# EAGLE board pcb (EAGLE 9.7.0)
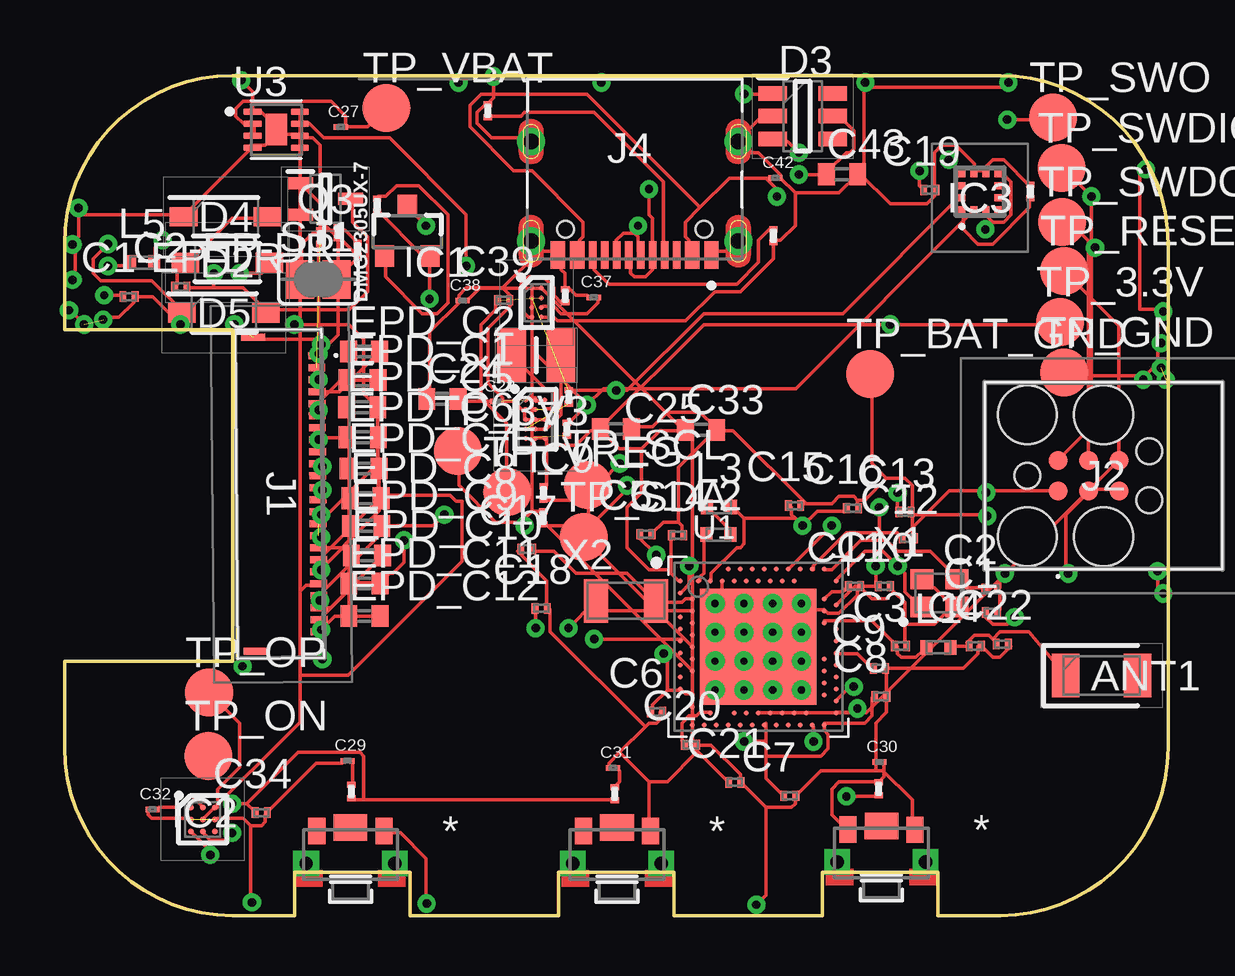
[diagram p0: board, top side]
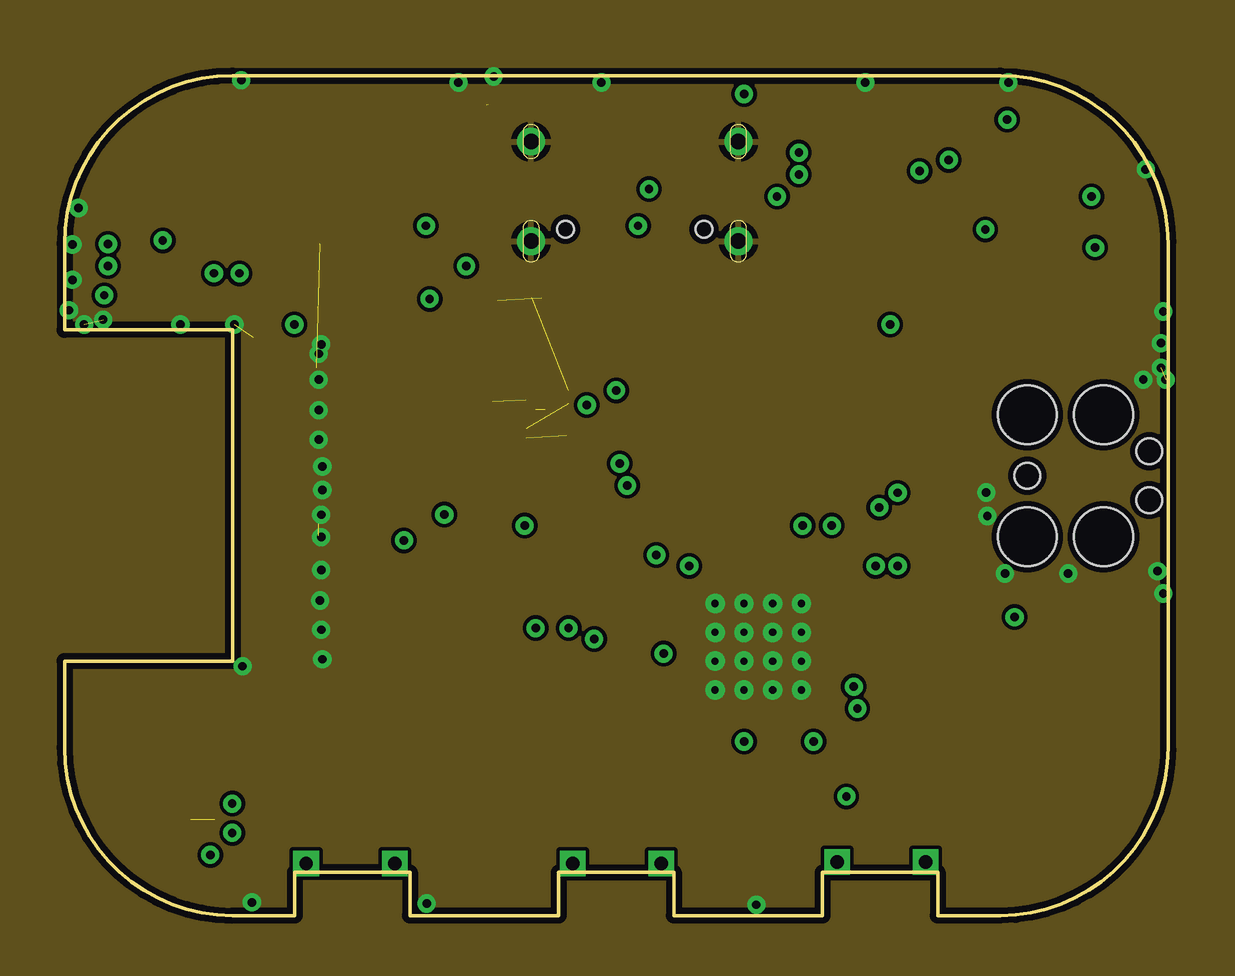
[diagram p1: board, inner layer Route2]
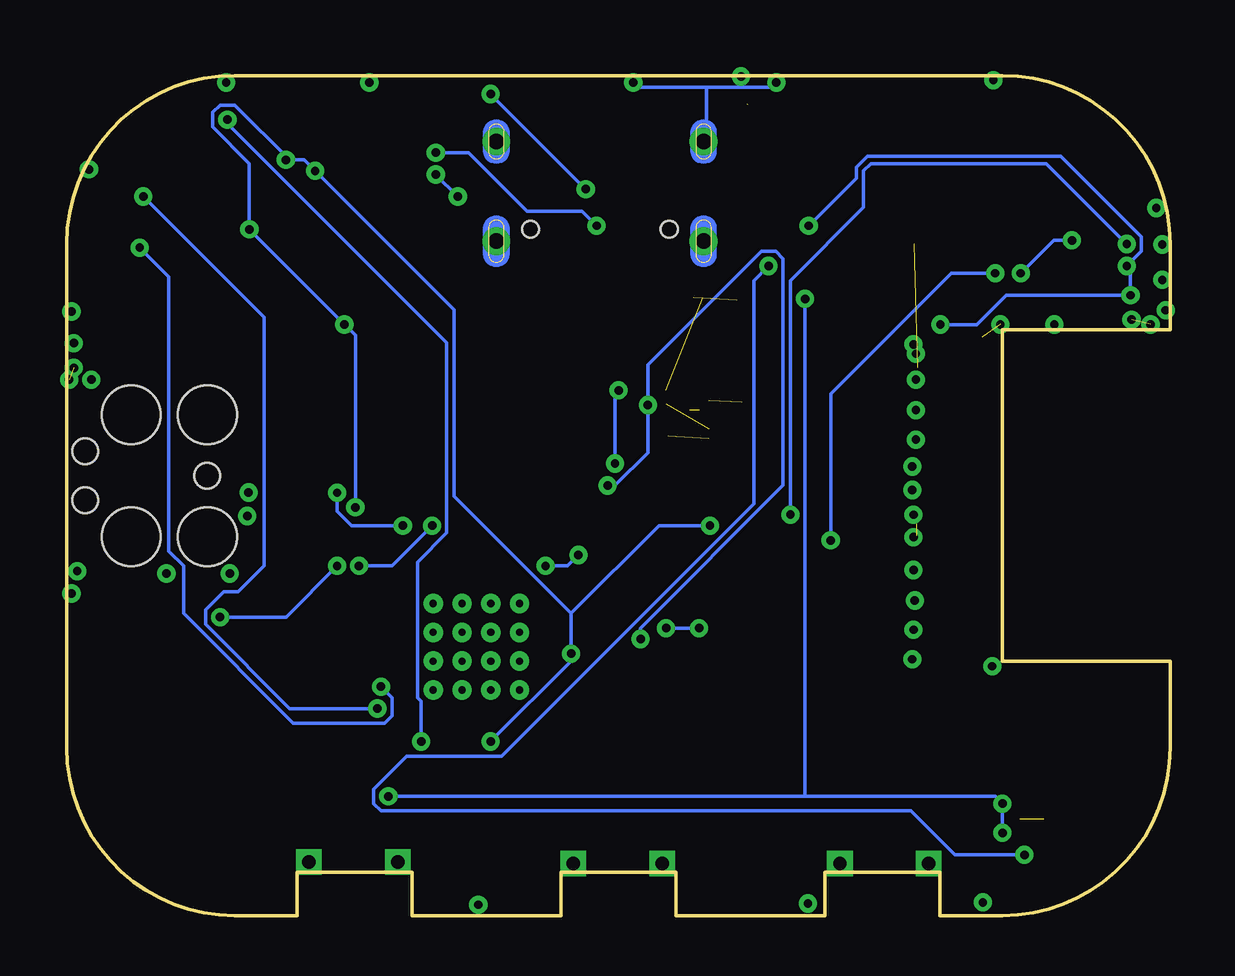
[diagram p2: board, bottom side, seen from below]

Size 46 x 35 mm. Coordinates in mm from the lower left corner, seen from the top.
Outline: 39,0 36.4,0 36.4,1.8 31.6,1.8 31.6,0 25.4,0 25.4,1.8 20.6,1.8 20.6,0 14.4,0 14.4,1.8 9.6,1.8 9.6,0 7,0 arc-90 0,7 0,10.6 7,10.6 7,24.4 0,24.4 0,28 arc-90 7,35 39,35 arc-90 46,28 46,7 arc-90 39,0
Copper layers (1+2*15+16): Top 0.035mm / dielectric 1.5mm / Route2 0.035mm / dielectric 0.15mm / Route15 0.035mm / dielectric 0.2mm / Bottom 0.035mm
Design rules "Fusion Electronics Design Rules *": minimum track width 6mil, minimum drill 0.35mm, track to track 6mil, track to pad 6mil, pad to pad 6mil, via to via 6mil, smd to smd 6mil, copper to edge 10mil, drill to drill 6mil, minimum pad ring 10mil, minimum via ring 8mil, stop-mask expansion 4mil, vias tented up to drill 9999mil, thermal gap 10mil

## Footprints (pad centres in the part's own frame; a part is rotated, then mirrored left to right if it is on the bottom)
2450AT18B100E_ANTC3216X140N = smd 1.15 x 1.8: 1 -1.5,0; 2 1.5,0
NORDIC_NRF_3_RESC0201_L = smd 0.28 x 0.43: 1 -0.255,0; 2 0.255,0
GRM011R60J152KE01L_2_CAPC0201X13N = smd 0.22 x 0.23: 1 -0.185,0; 2 0.185,0
ESP32_C6_LIBRARY_1_ESP32_WROVER_EAGLE-LTSPICE_C0402 = smd 0.7 x 0.9: 1 -0.65,0; 2 0.65,0
ESP32_C6_LIBRARY_5_SOD3716X135N = smd 1.15 x 0.8: 1 -1.75,0; 2 1.75,0
ESP32_C6_LIBRARY_3_SOT95P280X145-6N = smd 1.2 x 0.6: 1 -1.25,0.95; 2 -1.25,0; 3 -1.25,-0.95; 4 1.25,-0.95; 5 1.25,0; 6 1.25,0.95
ESP32_C6_LIBRARY_4_ESP32_C6_LIBRARY_4_ESP32_C6_LIBRARY_4_ESP32_C6_LIBRARY_4_ESP32_WROVER_SPARKFUN-DISCRETESEMI_SOT23-3 = smd 0.8 x 0.9: 1 -0.95,-1; 2 0.95,-1; 3 0,1.1
BQ25180YBGR_BGA8C40P2X4_100X155X50 = smd 0.2 x 0.2: A1 -0.2,0.6; A2 0.2,0.6; B1 -0.2,0.2; B2 0.2,0.2; C1 -0.2,-0.2; C2 0.2,-0.2; D1 -0.2,-0.6; D2 0.2,-0.6
DRV2605YZFR_BGA9C50P3X3_144X144X62 = smd 0.25 x 0.25: A1 -0.5,0.5; A2 0,0.5; A3 0.5,0.5; B1 -0.5,0; B2 0,0; B3 0.5,0; C1 -0.5,-0.5; C2 0,-0.5; C3 0.5,-0.5
BMA423_BMA423 = smd 0.3 x 0.35: 1 -0.75,-0.775; 2 -0.25,-0.775; 3 0.25,-0.775; 4 0.75,-0.775; 7 0.75,0.775; 8 0.25,0.775; 9 -0.25,0.775; 10 -0.75,0.775 | smd 0.35 x 0.3: 5 0.775,-0.25; 6 0.775,0.25; 11 -0.775,0.25; 12 -0.775,-0.25
RT6160AWSC_BGA15C40P3X5_140X230X60 = smd 0.216 x 0.216: A1 -0.4,0.8; A2 0,0.8; A3 0.4,0.8; B1 -0.4,0.4; B2 0,0.4; B3 0.4,0.4; C1 -0.4,0; C2 0,0; C3 0.4,0; D1 -0.4,-0.4; D2 0,-0.4; D3 0.4,-0.4; E1 -0.4,-0.8; E2 0,-0.8; E3 0.4,-0.8
503480-2400_5034802400 = smd 0.3 x 0.7: 1 -5.75,1.525; 2 -5.25,1.525; 3 -4.75,1.525; 4 -4.25,1.525; 5 -3.75,1.525; 6 -3.25,1.525; 7 -2.75,1.525; 8 -2.25,1.525; 9 -1.75,1.525; 10 -1.25,1.525; 11 -0.75,1.525; 12 -0.25,1.525; 13 0.25,1.525; 14 0.75,1.525; 15 1.25,1.525; 16 1.75,1.525; 17 2.25,1.525; 18 2.75,1.525; 19 3.25,1.525; 20 3.75,1.525; 21 4.25,1.525; 22 4.75,1.525; 23 5.25,1.525; 24 5.75,1.525 | smd 0.3 x 1: MP1 -6.54,-1.125; MP2 6.54,-1.125
TC2030-IDC_TC2030IDC = smd 0.783 x 0.783: 1 -0.953,-0.635; 2 -0.953,0.635; 3 0.317,-0.635; 4 0.317,0.635; 5 1.588,-0.635; 6 1.588,0.635 | hole 2.451: -2.223,-2.54; -2.223,2.54; 0.952,-2.54; 0.952,2.54 | hole 1.067: -2.223,0; 2.857,-1.016; 2.857,1.016
KH-TYPE-C-16P_KINGHELM_KH-TYPE-C-16P = smd 0.6 x 1.15: A1_B12 -3.2,4.725; A4_B9 -2.4,4.725; A9_B4 2.4,4.725; A12_B1 3.2,4.725 | smd 0.3 x 1.15: A5 -1.25,4.725; A6 -0.25,4.725; A7 0.25,4.725; A8 1.25,4.725; B5 1.75,4.725; B6 0.75,4.725; B7 -0.75,4.725; B8 -1.75,4.725 | drill 0.65 pad 1.05: SH1 -4.32,0; SH2 4.32,0; SH3 -4.32,4.15; SH4 4.32,4.15 | hole 0.7: -2.89,3.65; 2.89,3.65
NORDIC_NRF_2_RESC0402_L = smd 0.5 x 0.6: 1 -0.5,0; 2 0.5,0
MLP2016SR47MT0S1_INDC2016X100N = smd 1.2 x 2.2: 1 -1.028,0; 2 1.028,0
ESP32_C6_LIBRARY_6_SOT65P210X110-3N = smd 1.05 x 0.5: 1 -1.05,0.65; 2 -1.05,-0.65; 3 1.05,0
ERA-1AEB3401C_0201 = smd 0.35 x 0.25: 1 0,0.275; 2 0,-0.275
CPF0201D7K68C1_0201 = smd 0.35 x 0.25: 1 0,0.275; 2 0,-0.275
ESP32_C6_LIBRARY_7_JUMPER_SJ = smd 1.168 x 1.6: 1 -0.762,0; 2 0.762,0
2025-10-22_07-23-44_LIBRARY_SW_EVP-AKE31A_PAN = smd 0.711 x 1.092: 1 -1.4,-0.972; 2 1.4,-0.972 | drill 0.559 pad 0.914 square: 3 -1.848,0.381; 4 1.848,0.381 | smd 1.397 x 1.092: 5 0,-1.124
HECTOR_WATCH_1_TP20R = smd 2 x 2: TP 0,0
NORDIC_NRF_4_AQFN50P700X700X85_HS-74N = smd 4.85 x 4.85: P$74 0,0 | drill 0.3 pad 0.6: P$75 -1.8,1.8; P$76 -0.6,1.8; P$77 0.6,1.8; P$78 1.8,1.8; P$79 -1.8,0.6; P$80 -0.6,0.6; P$81 0.6,0.6; P$82 1.8,0.6; P$83 -1.8,-0.6; P$84 -0.6,-0.6; P$85 0.6,-0.6; P$86 1.8,-0.6; P$87 -1.8,-1.8; P$88 -0.6,-1.8; P$89 0.6,-1.8; P$90 1.8,-1.8 | smd 0.2 x 0.2: P$A8 -1.25,3.25; P$A10 -0.75,3.25; P$A12 -0.25,3.25; P$A14 0.25,3.25; P$A16 0.75,3.25; P$A18 1.25,3.25; P$A20 1.75,3.25; P$A22 2.25,3.25; P$A23 2.75,3.25; P$AA24 3.25,-2.25; P$AB2 -2.75,-2.5; P$AC5 -2,-2.75; P$AC9 -1,-2.75; P$AC11 -0.5,-2.75; P$AC13 0,-2.75; P$AC15 0.5,-2.75; P$AC17 1,-2.75; P$AC19 1.5,-2.75; P$AC21 2,-2.75; P$AC24 3.25,-2.75; P$AD2 -2.75,-3.25; P$AD4 -2.25,-3.25; P$AD6 -1.75,-3.25; P$AD8 -1.25,-3.25; P$AD10 -0.75,-3.25; P$AD12 -0.25,-3.25; P$AD14 0.25,-3.25; P$AD16 0.75,-3.25; P$AD18 1.25,-3.25; P$AD20 1.75,-3.25; P$AD22 2.25,-3.25; P$AD23 2.75,-3.25; P$B1 -3.25,2.75; P$B3 -2.5,2.75; P$B5 -2,2.75; P$B7 -1.5,2.75; P$B9 -1,2.75; P$B11 -0.5,2.75; P$B13 0,2.75; P$B15 0.5,2.75; P$B17 1,2.75; P$B19 1.5,2.75; P$B24 3.25,2.75; P$C1 -3.25,2.25; P$D2 -2.75,2; P$D23 2.75,2; P$E24 3.25,1.75; P$F2 -2.75,1.5; P$F23 2.75,1.5; P$G1 -3.25,1.25; P$H2 -2.75,1; P$H23 2.75,1; P$J1 -3.25,0.75; P$J24 3.25,0.75; P$K2 -2.75,0.5; P$L1 -3.25,0.25; P$L24 3.25,0.25; P$M2 -2.75,0; P$N1 -3.25,-0.25; P$N24 3.25,-0.25; P$P2 -2.75,-0.5; P$P23 2.75,-0.5; P$R1 -3.25,-0.75; P$R24 3.25,-0.75; P$T2 -2.75,-1; P$T23 2.75,-1; P$U1 -3.25,-1.25; P$U24 3.25,-1.25; P$V23 2.75,-1.5; P$W1 -3.25,-1.75; P$W24 3.25,-1.75; P$Y2 -2.75,-2; P$Y23 2.75,-2
ESP32_C6_LIBRARY_SON50P200X200X80-9N = smd 0.76 x 0.27: 1 -0.985,0.75; 2 -0.985,0.25; 3 -0.985,-0.25; 4 -0.985,-0.75; 5 0.985,-0.75; 6 0.985,-0.25; 7 0.985,0.25; 8 0.985,0.75 | smd 0.9 x 1.3: 9 0,0
NORDIC_NRF_BT-XTAL_2016_N = smd 0.95 x 0.85: 1 -0.725,-0.575; 2 0.725,-0.575; 3 0.725,0.575; 4 -0.725,0.575
NORDIC_NRF_1_XTAL_3215_N = smd 1 x 1.8: 1 -1.25,0; 2 1.25,0

## Placement (x,y rotation side)
ANT1  2450AT18B100E  [2450AT18B100E_ANTC3216X140N]  43.23,10 0 top
C1  12pF  [NORDIC_NRF_3_RESC0201_L]  38.64,12.63 0 top
C1-EP-DR  10uF  [NORDIC_NRF_3_RESC0201_L]  2.69,25.79 0 top
C2  12pF  [NORDIC_NRF_3_RESC0201_L]  38.62,13.62 0 top
C2-EP-DR  4.7uF/25V  [NORDIC_NRF_3_RESC0201_L]  4.85,26.19 0 top
C3  1pF  [NORDIC_NRF_3_RESC0201_L]  34.85,11.23 0 top
C4  1pF  [NORDIC_NRF_3_RESC0201_L]  37.96,11.23 0 top
C5  100nF  [NORDIC_NRF_3_RESC0201_L]  24.23,15.89 0 top
C6  4.7µF  [NORDIC_NRF_3_RESC0201_L]  24.68,8.48 0 top
C7  100nF  [NORDIC_NRF_3_RESC0201_L]  30.23,4.99 0 top
C8  100nF  [NORDIC_NRF_3_RESC0201_L]  34.03,9.13 0 top
C9  820pF  [NORDIC_NRF_3_RESC0201_L]  33.97,10.3 0 top
C10  N.C.  [NORDIC_NRF_3_RESC0201_L]  34.17,13.72 0 top
C11  100pF  [NORDIC_NRF_3_RESC0201_L]  32.93,13.72 0 top
C12  100nF  [NORDIC_NRF_3_RESC0201_L]  35.17,15.72 0 top
C13  N.C.  [NORDIC_NRF_3_RESC0201_L]  35.04,16.81 0 top
C14  4.7µF  [NORDIC_NRF_3_RESC0201_L]  25.56,15.85 0 top
C15  1.0µF  [NORDIC_NRF_3_RESC0201_L]  30.43,17.08 0 top
C16  47nF  [NORDIC_NRF_3_RESC0201_L]  32.85,16.97 0 top
C17  12pF  [NORDIC_NRF_3_RESC0201_L]  19.27,15.27 0 top
C18  12pF  [NORDIC_NRF_3_RESC0201_L]  19.87,12.8 0 top
C19  100nF  [NORDIC_NRF_3_RESC0201_L]  36.07,30.23 0 top
C20  4.7µF  [NORDIC_NRF_3_RESC0201_L]  26.1,7.12 0 top
C21  4.7µF  [NORDIC_NRF_3_RESC0201_L]  27.94,5.55 0 top
C22  N.C.  [NORDIC_NRF_3_RESC0201_L]  39.09,11.31 0 top
C23  0.1uF  [GRM011R60J152KE01L_2_CAPC0201X13N]  18.03,21.41 0 top
C24  10uF  [ESP32_C6_LIBRARY_1_ESP32_WROVER_EAGLE-LTSPICE_C0402]  15.75,21.53 0 top
C25  22uF  [ESP32_C6_LIBRARY_1_ESP32_WROVER_EAGLE-LTSPICE_C0402]  22.99,20.27 0 top
C27  0.1uF  [GRM011R60J152KE01L_2_CAPC0201X13N]  11.52,32.85 0 top
C29  1uF  [GRM011R60J152KE01L_2_CAPC0201X13N]  11.8,6.45 0 top
C30  1uF  [GRM011R60J152KE01L_2_CAPC0201X13N]  33.97,6.39 0 top
C31  1uF  [GRM011R60J152KE01L_2_CAPC0201X13N]  22.87,6.15 0 top
C32  1uF  [GRM011R60J152KE01L_2_CAPC0201X13N]  3.67,4.42 0 top
C33  22uF  [ESP32_C6_LIBRARY_1_ESP32_WROVER_EAGLE-LTSPICE_C0402]  26.54,20.24 0 top
C34  0.1uF  [NORDIC_NRF_3_RESC0201_L]  8.2,4.29 0 top
C37  1uF  [GRM011R60J152KE01L_2_CAPC0201X13N]  22.06,25.76 0 top
C38  1uF  [GRM011R60J152KE01L_2_CAPC0201X13N]  16.6,25.62 0 top
C39  10uF  [NORDIC_NRF_3_RESC0201_L]  18.31,25.64 0 top
C42  0.1uF  [GRM011R60J152KE01L_2_CAPC0201X13N]  29.63,30.73 0 top
C43  4.7uF  [ESP32_C6_LIBRARY_1_ESP32_WROVER_EAGLE-LTSPICE_C0402]  32.41,30.89 0 top
D2  ESP32_C6_LIBRARY_5_MBR0530  [ESP32_C6_LIBRARY_5_SOD3716X135N]  6.79,27.21 0 top
D3  USBLC6-2SC6Y  [ESP32_C6_LIBRARY_3_SOT95P280X145-6N]  30.77,33.31 0 top
D4  ESP32_C6_LIBRARY_5_MBR0530  [ESP32_C6_LIBRARY_5_SOD3716X135N]  6.72,29.12 0 top
D5  ESP32_C6_LIBRARY_5_MBR0530  [ESP32_C6_LIBRARY_5_SOD3716X135N]  6.65,25.11 0 top
DMG2305UX-7  20V/4.2A/52mΩ/1.4W  [ESP32_C6_LIBRARY_4_ESP32_C6_LIBRARY_4_ESP32_C6_LIBRARY_4_ESP32_C6_LIBRARY_4_ESP32_WROVER_SPARKFUN-DISCRETESEMI_SOT23-3]  14.29,28.49 0 top
EPD_C1  1uF/50V  [ESP32_C6_LIBRARY_1_ESP32_WROVER_EAGLE-LTSPICE_C0402]  12.42,22.31 0 top
EPD_C2  1uF/50V  [ESP32_C6_LIBRARY_1_ESP32_WROVER_EAGLE-LTSPICE_C0402]  12.49,23.5 0 top
EPD_C5  0.1uF/50V  [ESP32_C6_LIBRARY_1_ESP32_WROVER_EAGLE-LTSPICE_C0402]  12.41,21.18 0 top
EPD_C6  1uF/50V  [ESP32_C6_LIBRARY_1_ESP32_WROVER_EAGLE-LTSPICE_C0402]  12.43,19.93 0 top
EPD_C7  1uF/50V  [ESP32_C6_LIBRARY_1_ESP32_WROVER_EAGLE-LTSPICE_C0402]  12.47,18.63 0 top
EPD_C8  1uF/50V  [ESP32_C6_LIBRARY_1_ESP32_WROVER_EAGLE-LTSPICE_C0402]  12.55,17.39 0 top
EPD_C9  1uF/50V  [ESP32_C6_LIBRARY_1_ESP32_WROVER_EAGLE-LTSPICE_C0402]  12.58,16.24 0 top
EPD_C10  1uF/50V  [ESP32_C6_LIBRARY_1_ESP32_WROVER_EAGLE-LTSPICE_C0402]  12.61,15.01 0 top
EPD_C11  1uF/50V  [ESP32_C6_LIBRARY_1_ESP32_WROVER_EAGLE-LTSPICE_C0402]  12.5,13.84 0 top
EPD_C12  1uF/50V  [ESP32_C6_LIBRARY_1_ESP32_WROVER_EAGLE-LTSPICE_C0402]  12.5,12.48 0 top
IC1  BQ25180YBGR  [BQ25180YBGR_BGA8C40P2X4_100X155X50]  19.68,25.54 0 top
IC2  DRV2605YZFR  [DRV2605YZFR_BGA9C50P3X3_144X144X62]  5.76,4.01 0 top
IC3  BMA421  [BMA423_BMA423]  38.16,30.16 0 top
IC9  RT6160AWSC  [RT6160AWSC_BGA15C40P3X5_140X230X60]  19.63,20.68 0 top
J1  503480-2400  [503480-2400_5034802400]  9.04,17.57 270.5 top
J2  TC2030-IDC  [TC2030-IDC_TC2030IDC]  42.36,18.33 0 top
J4  KH-TYPE-C-16P  [KH-TYPE-C-16P_KINGHELM_KH-TYPE-C-16P]  23.77,32.25 180 top
L1  3.9nH  [NORDIC_NRF_2_RESC0402_L]  36.43,11.17 0 top
L2  10µH  [NORDIC_NRF_2_RESC0402_L]  27.26,15.87 0 top
L3  15nH  [NORDIC_NRF_2_RESC0402_L]  27.28,17.02 0 top
L5  68uH  [NORDIC_NRF_2_RESC0402_L]  3.23,27.21 0 top
L7  FTC252012SR47MBCA  [MLP2016SR47MT0S1_INDC2016X100N]  19.66,23.35 0 top
Q3  SI1308EDL-T1-GE3  [ESP32_C6_LIBRARY_6_SOT65P210X110-3N]  10.88,29.86 0 top
R1_EP_DR  0.47  [ERA-1AEB3401C_0201]  11.4,28.49 0 top
R1_USB  5K1  [CPF0201D7K68C1_0201]  17.65,33.53 0 top
R2  0  [CPF0201D7K68C1_0201]  20.93,20.26 0 top
R2_EP_DR  10K  [ERA-1AEB3401C_0201]  10.66,28.27 0 top
R2_USB  5K1  [ERA-1AEB3401C_0201]  29.55,28.32 0 top
R3  0  [ERA-1AEB3401C_0201]  40.26,30.17 0 top
R4  0  [CPF0201D7K68C1_0201]  21.02,21.61 0 top
R5  10k  [CPF0201D7K68C1_0201]  33.94,5.29 0 top
R7  10k  [CPF0201D7K68C1_0201]  11.96,5.17 0 top
R8  10k  [CPF0201D7K68C1_0201]  22.94,5.07 0 top
R9  10K  [ERA-1AEB3401C_0201]  20.87,25.82 0 top
R17  3K3  [CPF0201D7K68C1_0201]  19.97,17.61 0 top
R18  3K3  [CPF0201D7K68C1_0201]  19.95,16.57 0 top
R_PWR_EPD  10K  [CPF0201D7K68C1_0201]  13.03,29.6 0 top
R_TYPE_SEL  2.2  [ERA-1AEB3401C_0201]  12.22,27.76 0 top
SJ1  [ESP32_C6_LIBRARY_7_JUMPER_SJ]  10.58,26.51 0 top
SW_DN  2025-10-22_07-23-44_LIBRARY_EVP-AKE31ASW_EVP-AKE31A_PAN  [2025-10-22_07-23-44_LIBRARY_SW_EVP-AKE31A_PAN]  11.92,2.55 180 top
SW_ENT  2025-10-22_07-23-44_LIBRARY_EVP-AKE31ASW_EVP-AKE31A_PAN  [2025-10-22_07-23-44_LIBRARY_SW_EVP-AKE31A_PAN]  23.03,2.55 180 top
SW_UP  2025-10-22_07-23-44_LIBRARY_EVP-AKE31ASW_EVP-AKE31A_PAN  [2025-10-22_07-23-44_LIBRARY_SW_EVP-AKE31A_PAN]  34.05,2.61 179.9 top
TP_3.3V  HECTOR_WATCH_1_TPTP20R  [HECTOR_WATCH_1_TP20R]  41.5,24.73 0 top
TP_3V3  HECTOR_WATCH_1_TPTP20R  [HECTOR_WATCH_1_TP20R]  16.4,19.36 0 top
TP_BAT_GND  HECTOR_WATCH_1_TPTP20R  [HECTOR_WATCH_1_TP20R]  33.58,22.57 0 top
TP_GND  HECTOR_WATCH_1_TPTP20R  [HECTOR_WATCH_1_TP20R]  41.67,22.63 0 top
TP_ON  HECTOR_WATCH_1_TPTP20R  [HECTOR_WATCH_1_TP20R]  6,6.65 0 top
TP_OP  HECTOR_WATCH_1_TPTP20R  [HECTOR_WATCH_1_TP20R]  6.03,9.29 0 top
TP_RESET  HECTOR_WATCH_1_TPTP20R  [HECTOR_WATCH_1_TP20R]  41.66,26.86 0 top
TP_SCL  HECTOR_WATCH_1_TPTP20R  [HECTOR_WATCH_1_TP20R]  21.81,17.94 0 top
TP_SDA  HECTOR_WATCH_1_TPTP20R  [HECTOR_WATCH_1_TP20R]  21.65,15.77 0 top
TP_SWDCLK  HECTOR_WATCH_1_TPTP20R  [HECTOR_WATCH_1_TP20R]  41.59,28.9 0 top
TP_SWDIO  HECTOR_WATCH_1_TPTP20R  [HECTOR_WATCH_1_TP20R]  41.56,31.14 0 top
TP_SWO  HECTOR_WATCH_1_TPTP20R  [HECTOR_WATCH_1_TP20R]  41.21,33.25 0 top
TP_VBAT  HECTOR_WATCH_1_TPTP20R  [HECTOR_WATCH_1_TP20R]  13.42,33.65 0 top
TP_VREG  HECTOR_WATCH_1_TPTP20R  [HECTOR_WATCH_1_TP20R]  18.45,17.65 0 top
U1  NRF52840_QF  [NORDIC_NRF_4_AQFN50P700X700X85_HS-74N]  28.92,11.2 0 top
U3  MAX17048G+T10  [ESP32_C6_LIBRARY_SON50P200X200X80-9N]  8.83,32.75 0 top
X1  32MHz  [NORDIC_NRF_BT-XTAL_2016_N]  36.47,13.44 0 top
X2  32.768kHz  [NORDIC_NRF_1_XTAL_3215_N]  23.4,13.11 0 top

## Library data of the parts
ANT1 = InkTime_v5 (1); ARROW_PART_NUMBER: 2450AT18B100E; ARROW_PRICE-STOCK: https://www.arrow.com/en/products/2450at18b100e/johanson-dielectrics?utm_currency=USD&region=nac; DESCRIPTION: Antennas 2.45GHz ANTENNA; HEIGHT: 1.4mm; MANUFACTURER_NAME: JOHANSON TECHNOLOGY; MANUFACTURER_PART_NUMBER: 2450AT18B100E; MOUSER_PART_NUMBER: 609-2450AT18B100E; MOUSER_PRICE-STOCK: https://www.mouser.co.uk/ProductDetail/Johanson-Technology/2450AT18B100E?qs=yCnrNFeXz%252Bh5MFsFIXGZGA%3D%3D
C1 C1-EP-DR C2 C2-EP-DR C3-C22 C34 C39 L1-L3 L5 R1_EP_DR R1_USB R2 R2_EP_DR R2_USB R3-R5 R7-R9 R17 R18 R_PWR_EPD R_TYPE_SEL SJ1 TP_3.3V TP_3V3 TP_BAT_GND TP_GND TP_ON TP_OP TP_RESET TP_SCL TP_SDA TP_SWDCLK TP_SWDIO TP_SWO TP_VBAT TP_VREG U1 X1 X2 = InkTime_v5 (1)
C23 C27 C29-C32 C37 C38 C42 = InkTime_v5 (1); AVAILABILITY: In Stock; CHECK_PRICES: https://www.snapeda.com/parts/GRM011R60J152KE01L/Murata/view-part/?ref=eda; DESCRIPTION: SMD Capacitor X5R(EIA) with Capacitance: 1500pF Tol. 10%. Rated Voltage: 6.3Vdc; MF: Murata; MP: GRM011R60J152KE01L; PACKAGE: 0201 Murata; PRICE: None; SNAPEDA_LINK: https://www.snapeda.com/parts/GRM011R60J152KE01L/Murata/view-part/?ref=snap
C24 C25 C33 C43 EPD_C1 EPD_C2 EPD_C5-EPD_C12 = InkTime_v5 (1); SPICEMODEL: NONE; SPICEPREFIX: C
D2 D4 D5 = InkTime_v5 (1); AVAILABILITY: In Stock; CHECK_PRICES: https://www.snapeda.com/parts/MBR0530/Onsemi/view-part/?ref=eda; DESCRIPTION: Diode Schottky 30 V 500mA Surface Mount SOD-123; MF: ON Semiconductor; MP: MBR0530; PACKAGE: SOD-123-2 ON Semiconductor; PRICE: None; PURCHASE-URL: https://www.snapeda.com/api/url_track_click_mouser/?unipart_id=179458&manufacturer=ON Semiconductor&part_name=MBR0530&search_term=None; SNAPEDA_LINK: https://www.snapeda.com/parts/MBR0530/Onsemi/view-part/?ref=snap
D3 = InkTime_v5 (1); AVAILABILITY: In Stock; CHECK_PRICES: https://www.snapeda.com/parts/USBLC6-2SC6Y/STMicroelectronics/view-part/?ref=eda; DESCRIPTION: 17V Clamp 5A (8/20µs) Ipp Tvs Diode Surface Mount SOT-23-6; MF: STMicroelectronics; MP: USBLC6-2SC6Y; PACKAGE: SOT-23-6 STMicroelectronics; PRICE: None; SNAPEDA_LINK: https://www.snapeda.com/parts/USBLC6-2SC6Y/STMicroelectronics/view-part/?ref=snap
DMG2305UX-7 = InkTime_v5 (1); PROD_ID: TRAN-14388
IC1 = InkTime_v5 (1); ARROW_PART_NUMBER: BQ25180YBGR; ARROW_PRICE-STOCK: https://www.arrow.com/en/products/bq25180ybgr/texas-instruments?utm_currency=USD&region=nac; DESCRIPTION: Charger IC Lithium Ion/Polymer, Lithium Iron Phosphate 8-DSBGA (1.6x1.1); HEIGHT: 0.5mm; MANUFACTURER_NAME: Texas Instruments; MANUFACTURER_PART_NUMBER: BQ25180YBGR; MOUSER_PART_NUMBER: 595-BQ25180YBGR; MOUSER_PRICE-STOCK: https://www.mouser.co.uk/ProductDetail/Texas-Instruments/BQ25180YBGR?qs=doiCPypUmgEWjAK%252BJAX6Tw%3D%3D
IC2 = InkTime_v5 (1); ARROW_PART_NUMBER: DRV2605YZFR; ARROW_PRICE-STOCK: https://www.arrow.com/en/products/drv2605yzfr/texas-instruments?region=nac; DESCRIPTION: Haptic Driver for ERM/LRA with Built-In Library and Smart Loop Architecture; HEIGHT: 0.625mm; MANUFACTURER_NAME: Texas Instruments; MANUFACTURER_PART_NUMBER: DRV2605YZFR
IC3 = InkTime_v5 (1); ARROW_PART_NUMBER: BMA423; ARROW_PRICE-STOCK: https://www.arrow.com/en/products/bma423/bosch; DESCRIPTION: Accelerometers Triaxial low-g 12bit Acceleration Sensor; HEIGHT: 1mm; MANUFACTURER_NAME: BOSCH; MANUFACTURER_PART_NUMBER: BMA423; MOUSER_PART_NUMBER: 262-BMA423; MOUSER_PRICE-STOCK: https://www.mouser.co.uk/ProductDetail/Bosch-Sensortec/BMA423?qs=HXFqYaX1Q2xC%252BSgeGoX3mg%3D%3D
IC9 = InkTime_v5 (1); DESCRIPTION: Buck-Boost Regulator Positive Output Step-Up/Step-Down I2C DC-DC Controller IC 15-WL-CSP (BSC) (1.4x2.3); HEIGHT: 0.6mm; MANUFACTURER_NAME: RICHTEK; MANUFACTURER_PART_NUMBER: RT6160AWSC; MOUSER_PART_NUMBER: 835-RT6160AWSC; MOUSER_PRICE-STOCK: https://www.mouser.co.uk/ProductDetail/Richtek/RT6160AWSC?qs=amGC7iS6iy%2FLd9PSoixZXQ%3D%3D
J1 = InkTime_v5 (1); DESCRIPTION: FFC & FPC Connectors 0.5mm FPC RA SMT Dual Contact 24Ckt; HEIGHT: 1.87mm; MANUFACTURER_NAME: Molex; MANUFACTURER_PART_NUMBER: 503480-2400; MOUSER_PART_NUMBER: 538-503480-2400; MOUSER_PRICE-STOCK: https://www.mouser.co.uk/ProductDetail/Molex/503480-2400?qs=OAhjpuo3Vu7efIoxFh9AOw%3D%3D
J2 = InkTime_v5 (1); DESCRIPTION: CABLE ADAPTER 6 POS; HEIGHT: 19mm; MANUFACTURER_NAME: Tag Connect; MANUFACTURER_PART_NUMBER: TC2030-IDC
J4 = InkTime_v5 (1); AVAILABILITY: Not in stock; CHECK_PRICES: https://www.snapeda.com/parts/KH-TYPE-C-16P/Kinghelm/view-part/?ref=eda; MF: kinghelm; MP: KH-TYPE-C-16P; PACKAGE: None; PRICE: None; SNAPEDA_LINK: https://www.snapeda.com/parts/KH-TYPE-C-16P/Kinghelm/view-part/?ref=snap
L7 = InkTime_v5 (1); DESCRIPTION: SMD / SMT Inductors (Coils), L=0.47?H, L x W x T :; HEIGHT: 1mm; JLCPCB: https://jlcpcb.com/partdetail/6763488-FTC252012SR47MBCA/C5832368; MANUFACTURER_NAME: TDK; MANUFACTURER_PART_NUMBER: FTC252012SR47MBCA
Q3 = InkTime_v5 (1); AVAILABILITY: In Stock; CHECK_PRICES: https://www.snapeda.com/parts/SI1308EDL-T1-GE3/Vishay+Siliconix/view-part/?ref=eda; DESCRIPTION: Si1308EDL-T1-GE3 N-channel MOSFET Transistor, 1.5 A, 30 V, 3-Pin SC-70 | Siliconix / Vishay SI1308EDL-T1-GE3; MF: Vishay Siliconix; MP: SI1308EDL-T1-GE3; PACKAGE: SOT-323 Vishay Semiconductor; PRICE: None; PURCHASE-URL: https://www.snapeda.com/api/url_track_click_mouser/?unipart_id=274603&manufacturer=Vishay Siliconix&part_name=SI1308EDL-T1-GE3&search_term=None; SNAPEDA_LINK: https://www.snapeda.com/parts/SI1308EDL-T1-GE3/Vishay+Siliconix/view-part/?ref=snap
SW_DN SW_ENT SW_UP = InkTime_v5 (1); COPYRIGHT: Copyright (C) 2025 Ultra Librarian. All rights reserved.; DIGI-KEY_PART_NUMBER_1: P123437TR-ND; DIGI-KEY_PART_NUMBER_2: P123437CT-ND; DIGI-KEY_PART_NUMBER_3: P123437DKR-ND; MANUFACTURER_NAME: Panasonic; MANUFACTURER_PART_NUMBER: EVP-AKE31A
U3 = InkTime_v5 (1); AVAILABILITY: In Stock; CHECK_PRICES: https://www.snapeda.com/parts/MAX17048G+T10/Analog+Devices/view-part/?ref=eda; DESCRIPTION: 3µA 1-Cell/2-Cell Fuel Gauge with ModelGauge; MF: Analog Devices; MP: MAX17048G+T10; PACKAGE: TDFN-8 Maxim; PRICE: None; PURCHASE-URL: https://www.snapeda.com/api/url_track_click_mouser/?unipart_id=329239&manufacturer=Analog Devices&part_name=MAX17048G+T10&search_term=None; SNAPEDA_LINK: https://www.snapeda.com/parts/MAX17048G+T10/Analog+Devices/view-part/?ref=snap

## Nets
3V3/1.7D: C34.1 DMG2305UX-7.2 IC2.C2 R5.2 R7.2 R8.2 R_PWR_EPD.2
3V3/2.4A: C6.1 C7.1 C8.1 C12.1 C14.1 C19.1 C25.1 C33.1 IC3.3 IC3.7 IC3.10 IC9.E2 IC9.E3 J2.1 R17.1 R18.1 TP_3.3V.TP TP_3V3.TP U1.P$A22 U1.P$AD14 U1.P$AD23 U1.P$B1 U1.P$W1 U1.P$Y2
ALERT/1.6C: U3.5
ALERT/2.5C: U1.P$J24
D+/1.5D: D3.4
D+/2.7D: U1.P$AD6
D-/1.5D: D3.6
D-/2.7D: U1.P$AD4
DN: D3.1 J4.A7 J4.B7
DP: D3.3 J4.A6 J4.B6
EPD_3V3: C1-EP-DR.1 DMG2305UX-7.3 EPD_C5.2 J1.15 J1.16 L5.1
EPD_BUSY/1.5D: J1.9
EPD_BUSY/2.2D: U1.P$AD12
EPD_CS/1.4C: J1.12
EPD_CS/2.2D: U1.P$K2
EPD_DC/1.5D: J1.11
EPD_DC/2.2D: U1.P$AD10
EPD_RST/1.5D: J1.10
EPD_RST/2.2D: U1.P$AC11
GDR: J1.2 Q3.1 R2_EP_DR.2
GND: C1-EP-DR.2 C1.2 C2.2 C3.2 C4.2 C5.2 C6.2 C7.2 C8.2 C9.2 C10.2 C11.2 C12.2 C13.2 C14.2 C15.2 C16.2 C17.1 C18.2 C19.2 C20.2 C21.2 C22.2 C23.2 C24.1 C25.2 C29.1 C30.1 C31.1 C32.1 C33.2 C34.2 C37.1 C38.1 C39.2 C42.2 C43.2 D3.2 D4.1 EPD_C5.1 EPD_C6.1 EPD_C7.1 EPD_C8.1 EPD_C9.1 EPD_C10.1 EPD_C11.1 EPD_C12.1 IC1.D2 IC2.B1 IC2.B3 IC3.8 IC3.9 IC9.B1 IC9.C1 IC9.C2 IC9.C3 J1.8 J1.17 J1.MP1 J2.3 J2.5 J4.A1_B12 J4.A12_B1 J4.SH1 J4.SH2 J4.SH3 J4.SH4 R1_USB.1 R2_EP_DR.1 R2_USB.2 R3.1 R9.1 R_TYPE_SEL.1 SJ1.1 SW_DN.1 SW_ENT.1 SW_UP.1 TP_BAT_GND.TP TP_GND.TP U1.P$74 U1.P$75 U1.P$76 U1.P$77 U1.P$78 U1.P$79 U1.P$80 U1.P$81 U1.P$82 U1.P$83 U1.P$84 U1.P$85 U1.P$86 U1.P$87 U1.P$88 U1.P$89 U1.P$90 U1.P$B7 U1.P$F23 U3.1 U3.4 U3.6 U3.9 X1.2 X1.4
HAPTIC_EN/1.4C: IC2.A1
HAPTIC_EN/2.6A: U1.P$U1
IMU_INT1: U1.P$N1
IMU_INT2: U1.P$P2
JJ: C10.1 C15.1 C16.1 L3.2 U1.P$B5 U1.P$E24
LX1: IC9.B2 IC9.B3 L7.1
LX2: IC9.D2 IC9.D3 L7.2
MOSI/1.5B: J1.14
MOSI/2.2D: U1.P$B13
MU_INT1: IC3.5
MU_INT2: IC3.6
N$1: IC1.D1 R9.2
N$2: IC9.D1 R4.2
N$3: IC9.E1 R2.2
N$4: IC3.1 R3.2
N$5: C20.1 U1.P$AC5
N$6: C18.1 U1.P$F2 X2.1
N$7: C17.2 U1.P$D2 X2.2
N$8: C5.1 U1.P$C1
N$9: C9.1 U1.P$N24
N$10: L2.1 U1.P$B3
N$11: L2.2 L3.1
N$12: C3.1 L1.1 U1.P$H23
N$13: ANT1.1 C4.1 C22.1 L1.2
N$14: C11.1 U1.P$D23
N$15: C2.1 U1.P$A23 X1.3
N$16: C1.1 U1.P$B24 X1.1
N$17: C2-EP-DR.2 D5.2 L5.2 Q3.3
N$18: C2-EP-DR.1 D2.1 D4.2
N$20: R1_EP_DR.1 R_TYPE_SEL.2 SJ1.2
N$21: J1.MP2
N$22: C13.1 U1.P$A18
N$23: C32.2 IC2.A2
N$24: EPD_C2.2 J1.4
N$25: EPD_C1.2 J1.5
N$26: EPD_C2.1
N$27: EPD_C1.1
N$28: EPD_C6.2 J1.18
N$29: EPD_C7.2 J1.19
N$30: EPD_C8.2 J1.20
N$31: J4.A5 R1_USB.2
N$32: EPD_C10.2 J1.22
N$33: C31.2 R8.1
N$34: EPD_C12.2 J1.24
N$35: J4.B5 R2_USB.1
N$36: C29.2 R7.1
OUT: IC2.C3
OUT+: IC2.A3 TP_OP.TP
OUT-: TP_ON.TP
P0.04: U1.P$J1
P0.09: U1.P$L24
P0.13/1.5D: C30.2 R5.1 SW_UP.2
P0.13/2.6C: U1.P$AD8
P0.14/1.5D: SW_ENT.2
P0.14/2.7C: U1.P$AC9
P0.19: U1.P$AC15
P0.20: U1.P$AD16
P0.21: U1.P$AC17
P0.22: U1.P$AD18
P0.23: U1.P$AC19
P0.24: U1.P$AD20
P0.25: U1.P$AC21
P0.26: U1.P$G1
P0.27: U1.P$H2
P0.28: U1.P$B11
P0.29: U1.P$A10
P0.30: U1.P$B9
P0.31: U1.P$A8
P1.01/1.6C: DMG2305UX-7.1 R_PWR_EPD.1
P1.01/2.4B: U1.P$Y23
P1.02/1.6C: SW_DN.2
P1.02/2.8C: U1.P$W24
P1.03: U1.P$V23
P1.04: U1.P$U24
P1.05: U1.P$T23
P1.06: U1.P$R24
P1.07: U1.P$P23
P1.09: U1.P$R1
P1.10: U1.P$A20
P1.11: U1.P$B19
P1.12: U1.P$B17
P1.13: U1.P$A16
P1.14: U1.P$B15
P1.15: U1.P$A14
PMIC_INT: IC1.A1 U1.P$T2
PREVGH: D5.1 EPD_C9.2 J1.21
PREVGL: D2.2 EPD_C11.2 J1.23
RESE: J1.3 Q3.2 R1_EP_DR.2
RESET: J2.6 TP_RESET.TP U1.P$AC13
SCK/1.5B: J1.13
SCK/2.2D: U1.P$A12
SCL/1.4C: IC2.C1 U3.7
SCL/2.4C: IC1.B1 IC3.12 R4.1 R17.2 TP_SCL.TP U1.P$M2
SDA/1.4C: IC2.B2 U3.8
SDA/2.4C: IC1.C1 IC3.2 R2.1 R18.2 TP_SDA.TP U1.P$L1
SWDCLK: J2.4 TP_SWDCLK.TP U1.P$AA24
SWDIO: J2.2 TP_SWDIO.TP U1.P$AC24
SWO: TP_SWO.TP U1.P$AD22
VBAT/1.2A: C27.2 TP_VBAT.TP U3.2 U3.3
VBAT/2.5C: C37.2 IC1.C2
VBUS/1.5D: C42.1 C43.1 D3.5 J4.A4_B9 J4.A9_B4
VBUS/2.6D: C21.1 C38.2 IC1.A2 U1.P$AD2
VREG: C23.1 C24.2 C39.1 IC1.B2 IC9.A1 IC9.A2 IC9.A3 TP_VREG.TP

## Tracks (layer width: path | path; a pad name or v marks a point on that pad's centre or on a via)
3V3/1.7D  (via drill 0.35)
  Top 0.152: 12.48,4.82 12.02,4.82 R7.2 | 12.48,4.82 22.84,4.82 R8.2 | R_PWR_EPD.2 13.09,29.35 14.91,27.52 15.22,27.52 DMG2305UX-7.2 15.22,27.37 v15.22,25.7 | v6.99,3.44 6.69,3.14 6.08,3.14 5.77,3.44 IC2.C2 | 7.6,4.66 v6.99,4.66 | 7.6,4.66 7.91,4.36 C34.1 | v32.59,4.97 33.81,4.97 R5.2 | 12.48,4.82 12.48,6.65 12.32,6.8 9.73,6.8 7.6,4.66
  Bottom 0.152: v6.99,3.44 v6.99,4.66 7.3,4.97 15.22,4.97 | 15.22,4.97 v32.59,4.97 | 15.22,4.97 v15.22,25.7
3V3/2.4A  (via drill 0.35)
  Top 0.152: 25.28,14.42 25.28,15.79 C14.1 | 25.28,14.42 25.28,14.26 25.58,13.96 U1.P$B1 | IC9.E2 19.64,19.9 19.94,19.9 IC9.E3 20.1,19.9 20.1,19.6 | 20.1,19.6 20.1,17.92 R17.1 | 20.1,19.6 21.32,19.6 21.93,20.21 22.23,20.21 C25.1 | 24.06,19.45 24.82,20.21 25.89,20.21 C33.1 | 24.06,19.45 23.14,19.45 22.38,20.21 C25.1 | 25.28,14.42 24.36,14.42 23.45,15.33 23.45,17.01 24.06,17.62 24.06,19.45 | TP_3.3V.TP 41.43,24.63 v34.42,24.63 26.65,24.63 22.38,20.36 C25.1 | C8.1 33.66,9.08 33.66,8.32 33.36,8.02 31.68,8.02 U1.P$AD23 31.68,7.86 31.68,7.71 31.83,7.56 31.83,6.95 31.53,6.65 29.24,6.65 | 29.24,6.65 29.24,5.73 29.85,5.12 C7.1 | 29.24,6.65 29.24,7.25 | 29.24,7.25 29.24,8.02 U1.P$AD14 | 19.03,16.4 19.49,16.86 R18.1 | 19.03,16.4 17.96,16.4 16.44,17.92 16.44,19.29 TP_3V3.TP | 33.97,15.94 34.73,15.94 34.88,15.79 C12.1 36.89,17.7 J2.1 | 33.97,15.94 32.59,15.94 31.22,14.57 31.22,14.42 U1.P$A22 | 38.69,28.9 38.39,29.2 38.39,29.35 IC3.3 | 38.69,28.9 39.15,28.9 39.45,29.2 39.45,30.57 38.99,31.03 IC3.7 | 25.74,9.39 25.89,9.24 26.19,9.24 U1.P$Y2 | 25.13,9.39 24.52,8.78 24.52,8.63 C6.1 | 25.74,9.39 25.13,9.39 | 25.74,9.39 U1.P$W1 | v36.86,31.49 37.32,31.03 IC3.10 | v35.64,31.03 35.64,30.42 35.79,30.27 C19.1 | 25.13,9.39 25.13,10.76 v24.97,10.91 | v38.39,28.59 38.69,28.9 | v33.97,17.01 33.97,15.94 | v19.18,16.25 19.03,16.4 | v28.33,7.25 29.24,7.25
  Bottom 0.152: 36.71,31.49 36.1,31.49 v35.64,31.03 29.85,25.24 29.85,17.46 24.97,12.59 | 24.97,12.59 v24.97,10.91 24.97,10.61 v28.33,7.25 | 36.71,31.49 38.99,33.77 39.6,33.77 39.91,33.47 39.91,32.86 38.39,31.33 v38.39,28.59 v34.42,24.63 33.97,24.17 v33.97,17.01 | 36.71,31.49 v36.86,31.49 | v19.18,16.25 21.32,16.25 24.97,12.59
DN  (via drill 0.35)
  Top 0.152: J4.A7 23.6,27.52 23.6,26.76 23.75,26.61 24.21,26.61 24.52,26.91 J4.B7 24.52,27.68 24.52,29.05 24.36,29.2 v24.36,30.27 | v28.33,34.23 29.39,34.23 D3.1
  Bottom 0.152: v24.36,30.27 v28.33,34.23
DP  (via drill 0.35)
  Top 0.152: 23.6,28.44 23.75,28.44 23.91,28.29 23.91,27.68 J4.A6 | 23.6,28.44 23.3,28.44 22.99,28.13 22.99,27.68 J4.B6 | v30.61,31.79 30.16,32.25 29.55,32.25 D3.3 | 23.6,28.44 v23.91,28.74
  Bottom 0.152: v30.61,31.79 29.24,31.79 26.8,29.35 24.52,29.35 v23.91,28.74
EPD_3V3  (via drill 0.35)  (1 unrouted)
  Top 0.152: v1.66,25.85 2.42,25.85 C1-EP-DR.1 | v1.81,27.07 2.72,27.07 L5.1 | v9.58,24.63 11.87,24.63 12.48,24.02 12.48,21.73 12.93,21.27 EPD_C5.2 13.06,18.82 J1.15 | v15.07,28.74 14.31,29.51 DMG2305UX-7.3
  Bottom 0.152: v9.58,24.63 8.06,24.63 6.84,25.85 v1.66,25.85 1.66,26.91 v1.81,27.07 1.2,27.68 1.2,28.29 4.55,31.64 12.63,31.64 13.09,31.18 13.09,30.72 v15.07,28.74
GDR  (1 unrouted)
  Top 0.152: Q3.1 10.66,29.68 R2_EP_DR.2
GND  (via drill 0.35)  (5 unrouted)
  Top 0.152: C22.2 39.45,11.22 38.99,10.76 38.69,10.76 38.23,11.22 C4.2 38.08,11.22 38.08,10.91 37.47,10.3 34.27,10.3 C9.2 34.27,10.15 34.27,9.24 C8.2 34.27,9.08 34.27,8.47 33.81,8.02 33.81,6.49 C30.1 33.81,6.34 33.81,6.04 | 33.81,6.04 34.12,6.04 35.34,4.82 35.34,3.6 SW_UP.1 | 26.34,7.1 26.95,7.1 28.17,5.88 28.17,5.58 C21.2 28.33,5.43 29.24,4.51 | 29.24,4.51 30.31,4.51 30.46,4.66 30.46,4.97 C7.2 30.61,5.12 31.53,6.04 33.81,6.04 | C17.1 18.88,15.18 20.1,13.96 20.1,12.89 C18.2 20.25,12.74 20.25,11.83 24.21,7.86 | 24.21,7.86 24.36,8.02 24.67,8.02 24.82,8.17 24.82,8.47 C6.2 | 24.21,7.86 23.14,6.8 | 23.14,6.8 22.69,6.34 22.69,6.19 C31.1 | 24.36,5.58 24.36,3.6 SW_ENT.1 | 23.14,6.8 24.36,5.58 | 26.34,7.1 26.34,6.8 25.13,5.58 24.36,5.58 | 26.34,7.1 C20.2 | 37.01,12.89 37.17,12.74 X1.2 37.01,12.89 | 37.01,12.89 36.25,13.65 36.1,13.65 35.79,13.96 X1.4 | 35.03,12.13 35.03,13.05 34.58,13.5 | 35.03,12.13 35.03,11.37 C3.2 | 34.58,13.5 34.42,13.65 C10.2 | 34.58,13.5 34.27,13.2 33.66,13.2 33.2,13.65 C11.2 33.05,13.65 33.05,13.35 32.29,12.59 31.83,12.59 31.68,12.74 | 37.01,12.89 36.25,12.13 35.03,12.13 | 31.68,12.74 30.92,12.74 30.77,12.89 | U1.P$B7 27.41,13.2 27.26,13.05 U1.P$74 30.77,12.89 | 31.68,12.74 U1.P$F23 | 10.64,28.44 10.34,28.44 9.89,27.98 9.89,26.61 SJ1.1 | 10.64,28.44 10.65,28.44 R2_EP_DR.1 | 8.82,32.55 8.97,32.7 U3.9 | 8.82,32.55 8.36,32.1 7.91,32.1 U3.4 7.75,31.94 5.01,29.2 D4.1 4.86,29.2 0.59,29.2 | U3.9 8.82,32.86 8.21,33.47 7.91,33.47 U3.1 7.84,34.34 v7.37,34.81 | 8.82,32.55 9.73,32.55 U3.6 9.89,32.4 10.34,32.4 10.65,32.1 10.65,28.59 R2_EP_DR.1 | 8.82,32.55 U3.9 | IC1.D2 19.94,24.93 20.4,24.93 20.55,24.78 25.89,24.78 27.11,26 28.17,26 29.55,27.37 29.55,27.98 R2_USB.2 29.7,28.13 29.85,28.13 30.46,28.74 30.46,30.11
  Top 0.152: 19.64,20.67 19.33,20.67 IC9.C1 19.18,20.67 19.18,20.97 | 19.64,20.67 19.94,20.67 IC9.C3 | 19.64,20.67 IC9.C2 | 19.18,20.97 19.18,21.12 IC9.B1 | 18.27,21.43 18.72,21.43 19.18,20.97 | 18.27,26.15 16.74,26.15 16.44,25.85 16.44,25.7 C38.1 16.44,25.54 15.22,24.32 15.22,21.58 C24.1 | 18.27,26.15 18.57,25.85 18.57,25.7 C39.2 18.57,25.54 18.57,25.39 17.66,24.48 17.66,22.19 18.27,21.58 18.27,21.43 | 18.27,21.43 C23.2 | 38.23,31.03 38.39,31.03 IC3.8 | 38.23,31.03 37.93,31.03 | 38.23,31.03 38.69,31.49 39.15,31.49 40.21,30.42 R3.1 | C43.2 33.2,30.88 34.42,29.66 35.95,29.66 36.25,29.96 36.25,30.11 C19.2 36.25,30.27 36.25,31.79 36.56,32.1 37.17,32.1 37.93,31.33 37.93,31.03 | 37.93,31.03 IC3.9 | 25.58,16.4 24.97,16.4 24.52,15.94 C5.2 | 25.58,16.4 25.74,16.25 25.74,15.94 C14.2 | C25.2 23.75,20.36 24.52,20.36 25.13,20.97 26.5,20.97 27.11,20.36 C33.2 | 25.58,16.4 25.58,18.68 27.11,20.21 C33.2 | EPD_C12.1 11.87,12.59 11.87,13.81 EPD_C11.1 11.87,13.96 11.87,14.87 EPD_C10.1 11.87,15.03 11.56,15.33 | 11.56,15.33 10.65,15.33 J1.17 | 11.56,15.33 11.87,15.64 11.87,16.09 EPD_C9.1 11.87,16.25 11.87,17.31 EPD_C8.1 11.87,17.46 11.87,18.53 EPD_C7.1 11.87,18.68 11.87,19.9 EPD_C6.1 | C29.1 11.56,6.34 10.5,6.34 8.51,4.36 C34.2 8.36,4.21 8.36,3.9 8.21,3.75 7.75,3.75 | 7.75,3.75 7.45,4.05 6.38,4.05 IC2.B3 | C37.1 21.77,25.85 21.32,25.85 21.01,26.15 R9.1 20.86,26.15 20.86,26.76 20.71,26.91 20.71,27.52 J4.A12_B1 20.55,27.68 19.79,27.68 | 30.92,17.16 31.98,17.16 32.29,17.46 32.9,17.46 33.05,17.31 | 30.92,17.16 30.77,17.16 C15.2 | 33.05,17.31 33.05,17.01 C16.2 | J2.5 43.87,17.77 42.8,17.77 J2.3 42.65,17.62 41.74,16.7 41.74,14.26 v41.84,14.25
  Top 0.152: C32.1 3.48,4.36 3.48,4.21 3.64,4.05 5.16,4.05 IC2.B1 | 35.34,16.7 35.34,15.79 C12.2 | v0.33,26.49 0.44,26.61 0.44,27.83 v0.33,27.96 0.44,27.98 0.44,28.13 0.59,28.29 0.59,29.2 | 29.85,30.72 29.85,30.88 28.94,31.79 28.63,31.79 28.17,32.25 J4.SH1 28.17,32.4 28.94,33.16 29.39,33.16 D3.2 | R1_USB.1 17.51,33.77 17.2,33.47 17.2,33.01 17.81,32.4 19.33,32.4 J4.SH2 | v1.61,24.83 1.66,24.93 2.27,24.93 2.88,25.54 2.88,25.7 C1-EP-DR.2 3.67,25.79 v4.83,24.63 | v39.2,14.25 39.15,14.11 38.99,13.96 38.99,13.65 C2.2 38.99,13.5 38.99,12.74 C1.2 | 0.59,29.2 0.59,29.35 v0.58,29.48 0.59,29.2 | 10.65,19.9 J1.8 | 35.34,16.7 38.39,16.7 v38.47,16.65 | 35.34,16.7 C13.2 35.34,16.86 35.34,17.92 35.03,18.23 34.27,18.23 | 10.65,19.9 11.72,19.9 EPD_C6.1 | 10.65,19.9 v10.6,19.83 | EPD_C5.1 11.87,21.12 11.87,20.06 EPD_C6.1 | J1.MP1 7.91,24.02 10.5,24.02 10.65,23.87 v10.7,23.8 | SW_DN.1 13.39,3.44 14,3.44 15.07,2.38 15.07,0.55 v15.1,0.5 | J4.A1_B12 27.11,27.68 27.72,27.68 28.02,27.98 J4.SH3 | 33.05,17.31 33.36,17.31 34.27,18.23 | 19.79,27.68 19.49,27.98 J4.SH4 19.79,27.68 | 34.27,18.23 33.66,18.84 33.66,22.49 TP_BAT_GND.TP | TP_GND.TP 41.74,22.49 44.79,22.49 44.94,22.34 v44.97,22.33 45.08,22.51 45.33,22.76 45.58,22.76 v45.7,22.82 45.58,23.01 45.58,23.76 v45.7,23.85 45.58,24.01 45.58,25.01 v45.8,25.17 45.58,25.26 44.83,25.26 44.83,31.01 v45.07,31.09 | 7.75,3.75 7.75,0.7 v7.81,0.55 | 30.92,17.16 27.87,20.21 27.26,20.21 C33.2 | 30.46,30.11 32.29,30.11 33.05,30.88 C43.2 | 29.85,30.72 30.46,30.11 | 29.85,30.72 C42.2 | 19.79,27.68 18.27,26.15 | 30.77,12.89 U1.P$78 | 29.24,4.51 29.24,0.85 28.94,0.55 v28.84,0.45
  Top 0.152: v45.8,13.42 45.58,13.51 45.58,14.26 v45.56,14.35 | C43.2 33.08,31.01 33.33,31.01 33.33,34.51 v33.38,34.71 33.58,34.51 39.33,34.51 v39.35,34.71 | R_TYPE_SEL.1 11.7,28.56 R2_EP_DR.1 | v10.6,23.41 10.6,28.4 10.64,28.44 | v17.89,34.96 17.89,34.09 17.6,33.79 | v0.19,25.22 0.23,25.22 v0.82,24.63
  Bottom 0.152: 19.33,34.51 16.58,34.51 v16.42,34.71 | 19.33,34.51 19.33,32.26 J4.SH2 | 19.33,34.51 22.33,34.51 v22.38,34.71
  other vias: 7.08,24.63 45.9,22.33 38.42,17.63 7.42,10.39 10.75,10.68 10.7,11.91 10.65,13.13 10.7,14.4 10.7,15.77 10.7,16.7 10.75,17.73 10.75,18.71 10.6,21.06 10.6,22.33
  pour Route2: -5.59,-4.51 52.9,-4.51 53.34,-4.07 53.34,39.64 52.7,40.28 -5.58,39.79 -5.58,-4.51
JJ  (via drill 0.35)
  Top 0.152: 28.33,16.55 28.33,15.48 28.17,15.33 28.02,15.33 26.95,14.26 26.95,13.96 U1.P$B5 | 28.33,16.55 27.87,17.01 L3.2 | v33.81,14.57 33.81,13.81 C10.1 32.94,13.72 U1.P$E24 | 30.46,16.55 30.31,16.7 30.31,17.01 C15.1 | 30.46,16.55 v30.77,16.25 31.37,16.86 32.59,16.86 C16.1 | 30.46,16.55 28.33,16.55
  Bottom 0.152: v33.81,14.57 32.44,14.57 v30.77,16.25
LX1  (1 unrouted)
  Top 0.152: IC9.B3 20.1,21.12 20.25,21.12 20.4,21.27 20.4,21.73 20.25,21.88 20.1,21.88 18.72,23.26 L7.1
LX2
  Top 0.152: 20.08,20.26 19.58,20.26 IC9.D2 | 20.08,20.26 IC9.D3 | L7.2 20.69,20.87 20.08,20.26
N$1
  Top 0.152: IC1.D1 19.33,24.93 19.03,25.24 19.03,26.3 19.33,26.61 19.94,26.61 20.4,26.15 20.4,25.85 20.71,25.54 20.86,25.54 R9.2
N$2  (1 unrouted)
N$3  (1 unrouted)
N$4
  Top 0.152: IC3.1 37.47,29.35 37.47,28.59 38.08,27.98 38.69,27.98 40.21,29.51 40.21,29.81 R3.2
N$5
  Top 0.152: U1.P$AC5 26.95,8.47 26.5,8.47 26.34,8.32 26.04,8.32 25.74,8.02 25.74,7.25 C20.1
N$6  (via drill 0.35)
  Top 0.152: v19.64,11.98 19.64,12.74 C18.1 | v21.01,11.98 22.08,13.05 X2.1 22.56,12.7 U1.P$F2
  Bottom 0.152: v21.01,11.98 v19.64,11.98
N$7
  Top 0.152: U1.P$D2 26.19,13.2 25.89,13.2 25.74,13.05 24.67,13.05 X2.2 24.52,13.2 23.45,14.26 21.32,14.26 20.4,15.18 19.64,15.18 C17.2
N$8  (via drill 0.35)
  Top 0.152: v26.04,14.57 26.04,13.81 25.74,13.5 U1.P$C1 | v24.67,15.03 23.91,15.79 C5.1
  Bottom 0.152: v26.04,14.57 25.13,14.57 v24.67,15.03
N$9
  Top 0.152: U1.P$N24 32.14,10.91 33.05,10.91 33.66,10.3 C9.1
N$10
  Top 0.152: U1.P$B3 26.5,13.96 26.5,14.11 26.65,14.26 26.65,15.79 L2.1
N$11
  Top 0.152: L3.1 26.8,17.01 27.87,15.94 L2.2
N$12
  Top 0.152: U1.P$H23 31.68,12.28 33.66,12.28 34.58,11.37 C3.1 34.73,11.22 34.73,10.91 34.88,10.76 35.49,10.76 35.79,11.06 L1.1
N$13
  Top 0.152: L1.2 37.01,11.22 37.62,11.22 C4.1 37.62,11.37 37.93,11.67 38.54,11.67 38.69,11.52 | 38.69,11.52 38.84,11.37 C22.1 | 38.69,11.52 38.99,11.83 40.19,11.83 ANT1.1
N$14
  Top 0.152: U1.P$D23 31.98,13.5 32.44,13.5 32.59,13.65 C11.1
N$15
  Top 0.152: U1.P$A23 31.68,14.42 31.98,14.42 33.2,15.64 34.27,15.64 34.73,15.18 36.1,15.18 37.17,14.11 X1.3 37.32,13.96 37.62,13.65 38.23,13.65 C2.1
N$16  (via drill 0.35)
  Top 0.152: U1.P$B24 32.14,13.96 33.36,15.18 34.12,15.18 v34.73,14.57 35.03,14.26 35.03,13.5 35.64,12.89 X1.1 | v39.6,12.44 39.3,12.13 38.69,12.13 38.39,12.44 38.39,12.59 C1.1
  Bottom 0.152: v39.6,12.44 36.86,12.44 v34.73,14.57
N$17  (via drill 0.35)
  Top 0.152: 6.23,26.15 7.45,26.15 8.36,25.24 D5.2 8.51,25.24 11.87,25.24 12.63,26 12.63,28.29 12.02,28.9 12.02,29.81 Q3.3 | 6.23,26.15 5.16,26.15 C2-EP-DR.2 | v4.09,28.13 3.79,27.83 3.79,27.22 L5.2 | 6.23,26.15 v6.23,26.76
  Bottom 0.152: v4.09,28.13 4.86,28.13 v6.23,26.76
N$18
  Top 0.152: C2-EP-DR.1 4.7,26.3 4.7,26.76 5.01,27.07 D2.1 5.16,27.22 6.99,29.05 8.36,29.05 D4.2
N$20
  Top 0.152: SJ1.2 11.41,26.61 12.17,27.37 R_TYPE_SEL.2 11.4,28.3 R1_EP_DR.1
N$22  (via drill 0.35)
  Top 0.152: v31.98,16.25 30.16,14.42 U1.P$A18 | v34.73,17.62 34.73,16.86 C13.1
  Bottom 0.152: v31.98,16.25 34.12,16.25 34.73,16.86 v34.73,17.62
N$23
  Top 0.152: C32.2 3.94,4.51 4.7,4.51 5.16,4.97 5.31,4.97 5.77,4.51 IC2.A2
N$24
  Top 0.152: EPD_C2.2 11.47,21.83 J1.4
N$25
  Top 0.152: J1.5 11.51,22.31 EPD_C1.2
N$28
  Top 0.152: J1.18 13.08,17.32 EPD_C6.2
N$29
  Top 0.152: EPD_C7.2 13.12,16.86 J1.19
N$30
  Top 0.152: J1.20 10.58,13.76 10.08,13.76 9.83,13.51 9.83,10.01 11.83,10.01 16.58,14.76 16.58,17.26 16.33,17.26 16.08,17.51 13.33,17.51 EPD_C8.2
N$31
  Top 0.152: R1_USB.2 17.66,33.32 19.03,33.32 19.18,33.47 22.08,33.47 24.97,30.57 24.97,27.68 J4.A5
N$32
  Top 0.152: EPD_C10.2 11.08,12.83 J1.22
N$33
  Top 0.152: C31.2 23.14,6.04 23.14,5.58 22.99,5.43 R8.1
N$34
  Top 0.152: J1.24 11.26,12.48 EPD_C12.2
N$35
  Top 0.152: R2_USB.1 29.39,28.59 28.94,28.13 28.94,27.22 28.02,26.3 22.69,26.3 22.08,26.91 22.08,27.52 J4.B5
N$36
  Top 0.152: C29.2 12.02,6.34 12.02,5.43 R7.1
OUT+
  Top 0.152: IC2.A3 6.38,4.51 6.38,5.27 7.3,6.19 7.3,8.02 6.08,9.24 TP_OP.TP
P0.13/1.5D
  Top 0.152: SW_UP.2 32.59,3.6 31.98,4.21 31.98,5.27 32.29,5.58 33.81,5.58 R5.1 34.16,5.78 C30.2
P1.01/1.6C
  Top 0.152: R_PWR_EPD.1 13.09,29.96 13.39,29.96 13.85,30.42 14.76,30.42 15.98,29.2 15.98,25.54 15.52,25.09 14.91,25.09 13.39,26.61 13.39,27.37 DMG2305UX-7.1
PMIC_INT
  Top 0.152: U1.P$T2 19.48,16.89 IC1.A1
PREVGH  (via drill 0.35)
  Top 0.152: v15.83,16.7 15.37,16.25 EPD_C9.2 13.23,15.96 J1.21 | v1.81,27.98 1.2,27.37 1.2,26.76 1.5,26.46 3.64,26.46 4.86,25.24 D5.1
  Bottom 0.152: v15.83,16.7 15.83,26.46 12.78,29.51 12.78,31.03 12.48,31.33 5.16,31.33 v1.81,27.98
PREVGL  (via drill 0.35)
  Top 0.152: v14.15,15.64 14.15,14.72 13.7,14.26 13.54,14.26 13.24,13.96 13.18,13.87 | v7.3,26.76 8.21,26.76 8.51,27.07 D2.2 | 13.18,13.87 EPD_C11.2 | J1.23 12.15,13.87 13.18,13.87
  Bottom 0.152: v14.15,15.64 14.15,21.73 9.12,26.76 v7.3,26.76
RESE
  Top 0.152: Q3.2 10.41,29.21 R1_EP_DR.2 11.4,24.2 10.52,23.32 J1.3
RESET
  Top 0.152: TP_RESET.TP 43.95,24.57 J2.6 33.43,8.45 U1.P$AC13
SCL/1.4C  (via drill 0.35)
  Top 0.152: v6.08,2.53 6.08,2.68 5.31,3.44 IC2.C1 | v16.74,27.07 16.74,29.2 13.54,32.4 10.8,32.4 10.19,33.01 9.89,33.01 U3.7
  Bottom 0.152: v6.08,2.53 8.97,2.53 10.8,4.36 32.9,4.36 33.2,4.66 33.2,5.27 31.83,6.65 27.87,6.65 17.35,17.16 17.35,26.46 v16.74,27.07
SCL/2.4C  (via drill 0.35)  (1 unrouted)
  Top 0.152: R17.2 20.1,17.31 21.16,17.31 21.77,17.92 TP_SCL.TP 21.83,17.97 | R4.1 21.16,21.88 v22.99,21.88 23.45,21.88 26.65,25.09 32.44,25.09 37.32,29.96 IC3.12 | v23.14,18.84 22.38,18.07 21.93,18.07 21.83,17.97 | U1.P$M2 21.83,15.54 21.83,17.97
  Bottom 0.152: v23.14,18.84 23.14,21.73 v22.99,21.88
SDA/1.4C
  Top 0.152: IC2.B2 9.81,8.07 U3.8
SDA/2.4C  (via drill 0.35)
  Top 0.152: R18.2 20.1,16.25 21.16,16.25 21.62,15.79 TP_SDA.TP 21.77,15.79 21.77,16.09 23.45,17.77 v23.45,17.92 | v22.08,11.52 25.74,11.52 U1.P$L1 | v21.77,21.27 21.01,20.51 R2.1 | v21.77,21.27 19.48,23.57 IC1.C1 | v21.77,21.27 22.46,21.96 30.48,21.96 IC3.2
  Bottom 0.152: v22.08,11.52 22.08,11.98 16.13,17.92 16.13,27.37 16.44,27.68 17.05,27.68 21.77,22.95 v21.77,21.27 21.77,19.29 23.14,17.92 v23.45,17.92
SWDCLK  (via drill 0.35)
  Top 0.152: v32.9,9.54 32.75,9.54 32.14,8.93 U1.P$AA24 | 42.68,28.11 v42.96,27.83 | TP_SWDCLK.TP 41.74,29.05 41.83,28.95 42.68,28.11 | J2.4 42.68,28.11
  Bottom 0.152: v32.9,9.54 32.44,9.08 32.44,8.32 32.75,8.02 36.56,8.02 41.13,12.59 41.13,14.57 41.74,15.18 41.74,26.61 v42.96,27.83
SWDIO  (via drill 0.35)
  Top 0.152: v33.05,8.63 32.9,8.47 32.14,8.47 U1.P$AC24 | TP_SWDIO.TP 41.58,31.18 v42.8,29.96 42.8,20.36 J2.2
  Bottom 0.152: v33.05,8.63 36.71,8.63 40.21,12.13 40.21,12.74 39.45,13.5 38.84,13.5 37.77,14.57 37.77,24.93 v42.8,29.96
SWO  (via drill 0.35)
  Top 0.152: v31.22,7.25 31.22,7.86 U1.P$AD22 | v39.3,33.16 41.13,33.16 TP_SWO.TP
  Bottom 0.152: v31.22,7.25 31.22,8.93 31.37,9.08 31.37,14.72 30.16,15.94 30.16,23.87 39.3,33.01 v39.3,33.16
VBAT/1.2A
  Top 0.152: U3.3 7.91,32.55 7.91,33.01 U3.2 7.75,33.01 7.45,33.01 7.14,33.32 7.14,33.62 7.45,33.92 11.11,33.92 11.72,33.32 C27.2 | C27.2 12.63,32.86 13.39,33.62 TP_VBAT.TP | C27.2
VBAT/2.5C
  Top 0.152: IC1.C2 19.94,25.39 20.4,25.39 20.71,25.09 21.77,25.09 22.23,25.54 22.23,25.7 C37.2
VBUS/1.5D  (via drill 0.35)
  Top 0.152: D3.5 32.14,33.16 32.44,33.16 32.9,32.7 32.9,31.94 32.75,31.79 32.59,31.79 31.83,31.03 C43.1 31.68,30.88 v30.61,30.88 | 29.24,30.72 27.72,30.72 26.5,29.51 | 29.24,30.72 29.39,30.72 C42.1 | 26.5,29.51 25.89,28.9 25.89,28.29 26.04,28.13 26.04,27.68 J4.A4_B9 | 26.5,29.51 21.77,34.23 17.35,34.23 16.9,33.77 16.9,32.86 18.72,31.03 19.49,31.03 21.62,28.9 21.62,28.29 21.47,28.13 21.47,27.68 J4.A9_B4 | v29.7,29.96 29.7,30.27 29.24,30.72
  Bottom 0.152: v29.7,29.96 v30.61,30.88
VBUS/2.6D
  Top 0.152: C38.2 17.3,26.14 IC1.A2 26.17,19.85 U1.P$AD2 26.17,7.07 C21.1
VREG  (2 unrouted)
  Top 0.152: 17.35,21.43 16.44,21.43 C24.2 | 17.35,21.43 17.51,21.43 | 17.51,21.43 17.81,21.43 C23.1 | 17.35,21.43 17.35,24.63 17.96,25.24 17.96,25.54 C39.1 | 17.51,21.43 18.42,20.51 18.42,17.77 TP_VREG.TP | IC9.A1 19.18,21.58 19.64,21.58 IC9.A2 19.64,21.43 19.94,21.43 IC9.A3